# EAGLE board motor_PCB (EAGLE 8.6.0)
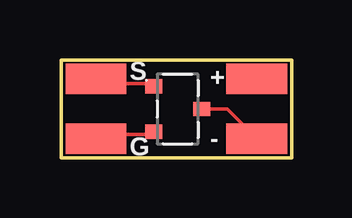
[diagram p0: board, top side]

Size 9.65 x 4.1 mm. Coordinates in mm from the lower left corner, seen from the top.
Outline: 0,0 0.05,0
Outline: 0.05,0 0.05,4.1 9.65,4.1 9.65,0 0.05,0
Copper layers (1*16): Top 0.035mm / dielectric 1.5mm / Bottom 0.035mm
Design rules "default *": minimum track width 6mil, minimum drill 0.35mm, track to track 6mil, track to pad 6mil, pad to pad 6mil, via to via 6mil, smd to smd 6mil, copper to edge 0mil, drill to drill 6mil, minimum pad ring 10mil, minimum via ring 8mil, stop-mask expansion 4mil, vias tented up to drill 0mil, thermal gap 10mil

## Footprints (pad centres in the part's own frame; a part is rotated, then mirrored left to right if it is on the bottom)
TO-236AB = smd 0.6 x 0.7: 1 0.3,0.35; 2 2.2,0.35; 3 1.25,2.35
SMD1,27-2,54 = smd 1.27 x 2.54: 1 0,0

## Placement (x,y rotation side)
M1  2N7002P  [TO-236AB]  3.55,3.3 270 top
PAD1  [SMD1,27-2,54]  1.5,3.3 90 top
PAD2  [SMD1,27-2,54]  1.5,0.8 90 top
PAD3  [SMD1,27-2,54]  8.2,0.8 90 top
PAD4  [SMD1,27-2,54]  8.2,3.3 90 top

## Library data of the parts
M1 = SeanSylwester
PAD1-PAD4 = wirepad

## Nets
N$1: M1.1 PAD1.1
N$2: M1.2 PAD2.1
N$3: M1.3 PAD3.1

## Tracks (layer width: path | path; a pad name or v marks a point on that pad's centre or on a via)
N$1
  Top 0.152: M1.1 3.77,3.11 1.79,3.11 1.64,3.27 PAD1.1
N$2
  Top 0.152: M1.2 3.77,0.98 1.79,0.98 1.64,0.83 PAD2.1
N$3
  Top 0.152: M1.3 6.97,2.05 8.19,0.83 PAD3.1

## Text on the board
tNames: S | + | G | -